# Altium PCB STC89C52.PcbDoc
Units mil, origin at the board's own origin, x right, y up, seen from the top; angles counter-clockwise.
Board outline 1370 x 1620 mil, 2 copper layers (Top Layer, Bottom Layer); 20 components, 53 nets, 124 pads, 8 vias.
Unrouted connection lines stored in the file: 5.
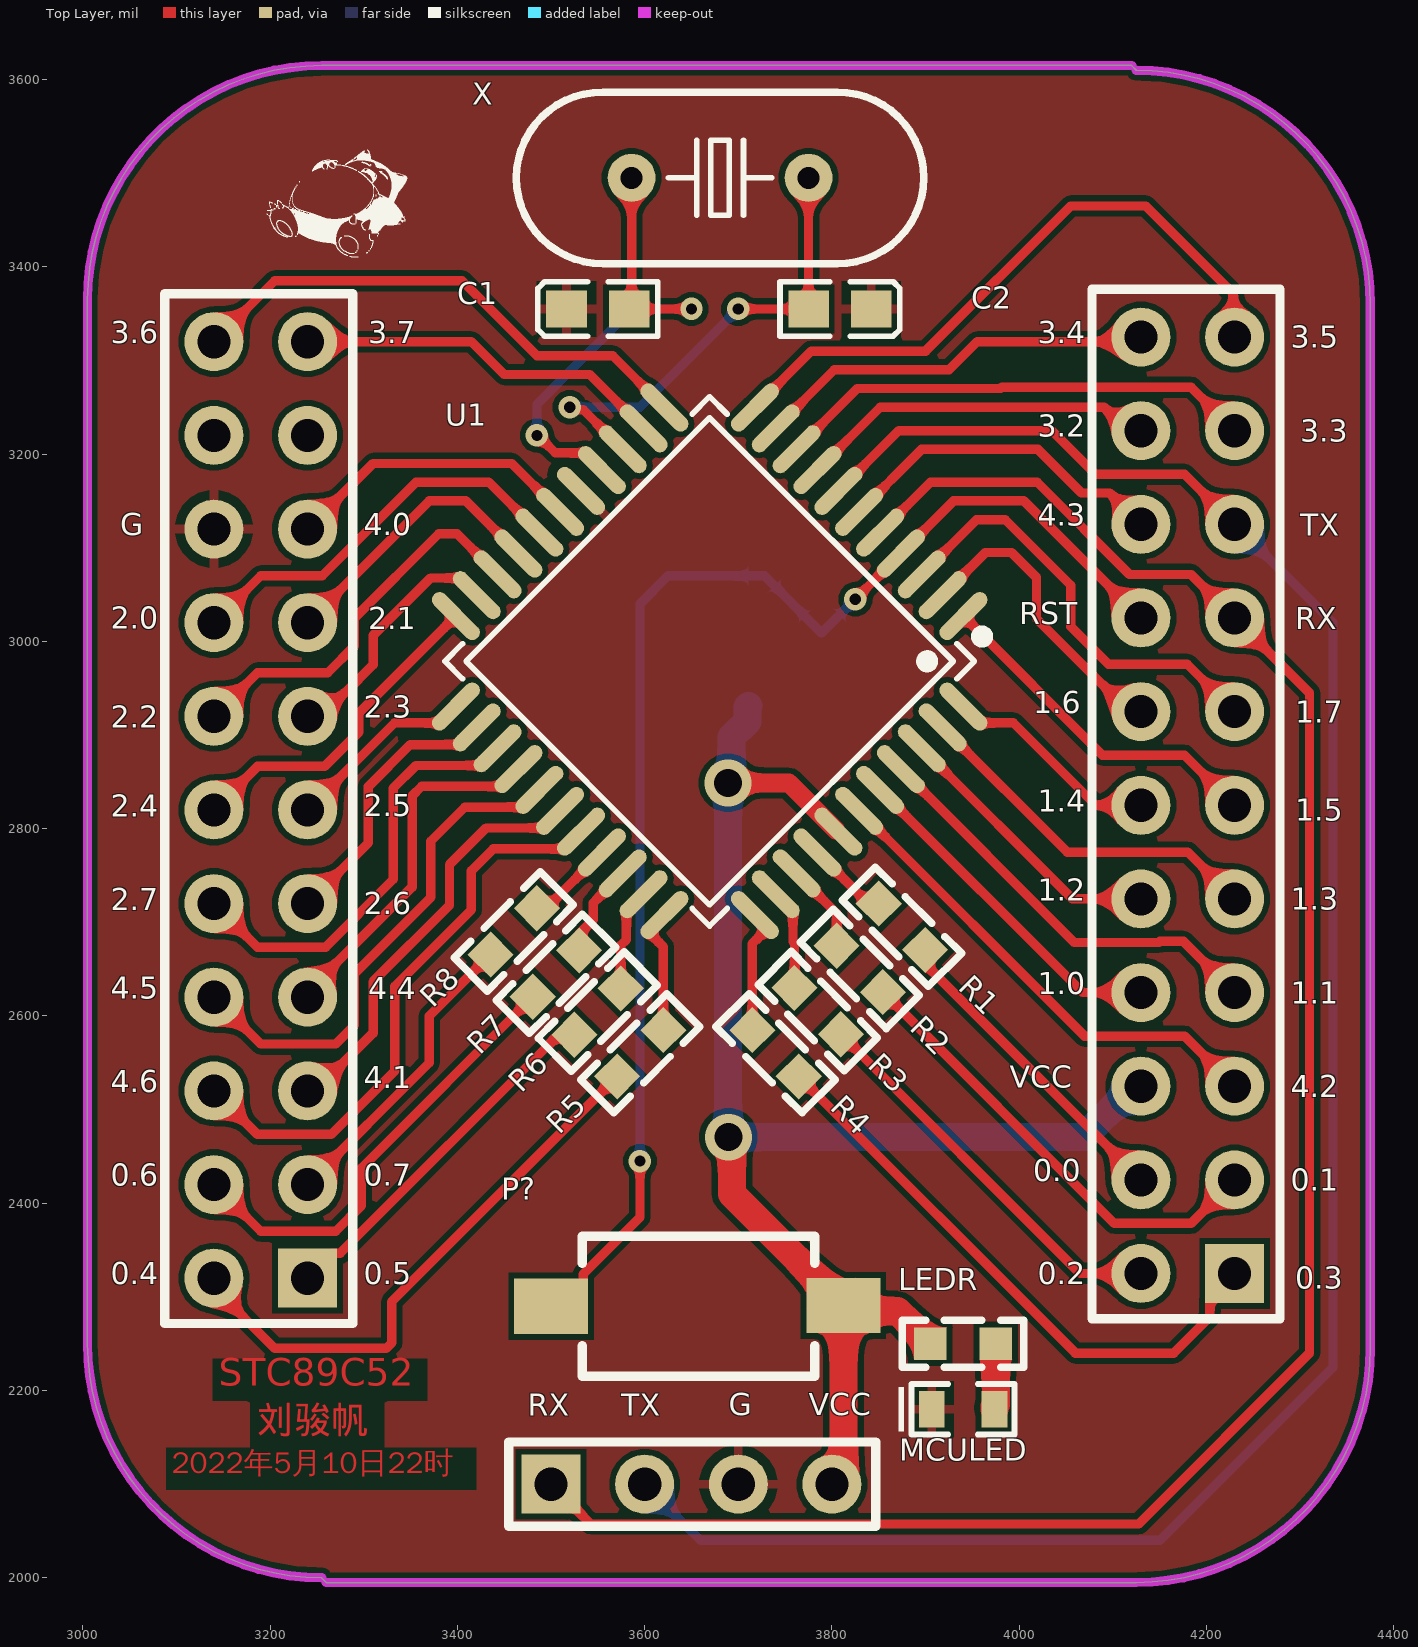
[diagram p0: Top Layer view]
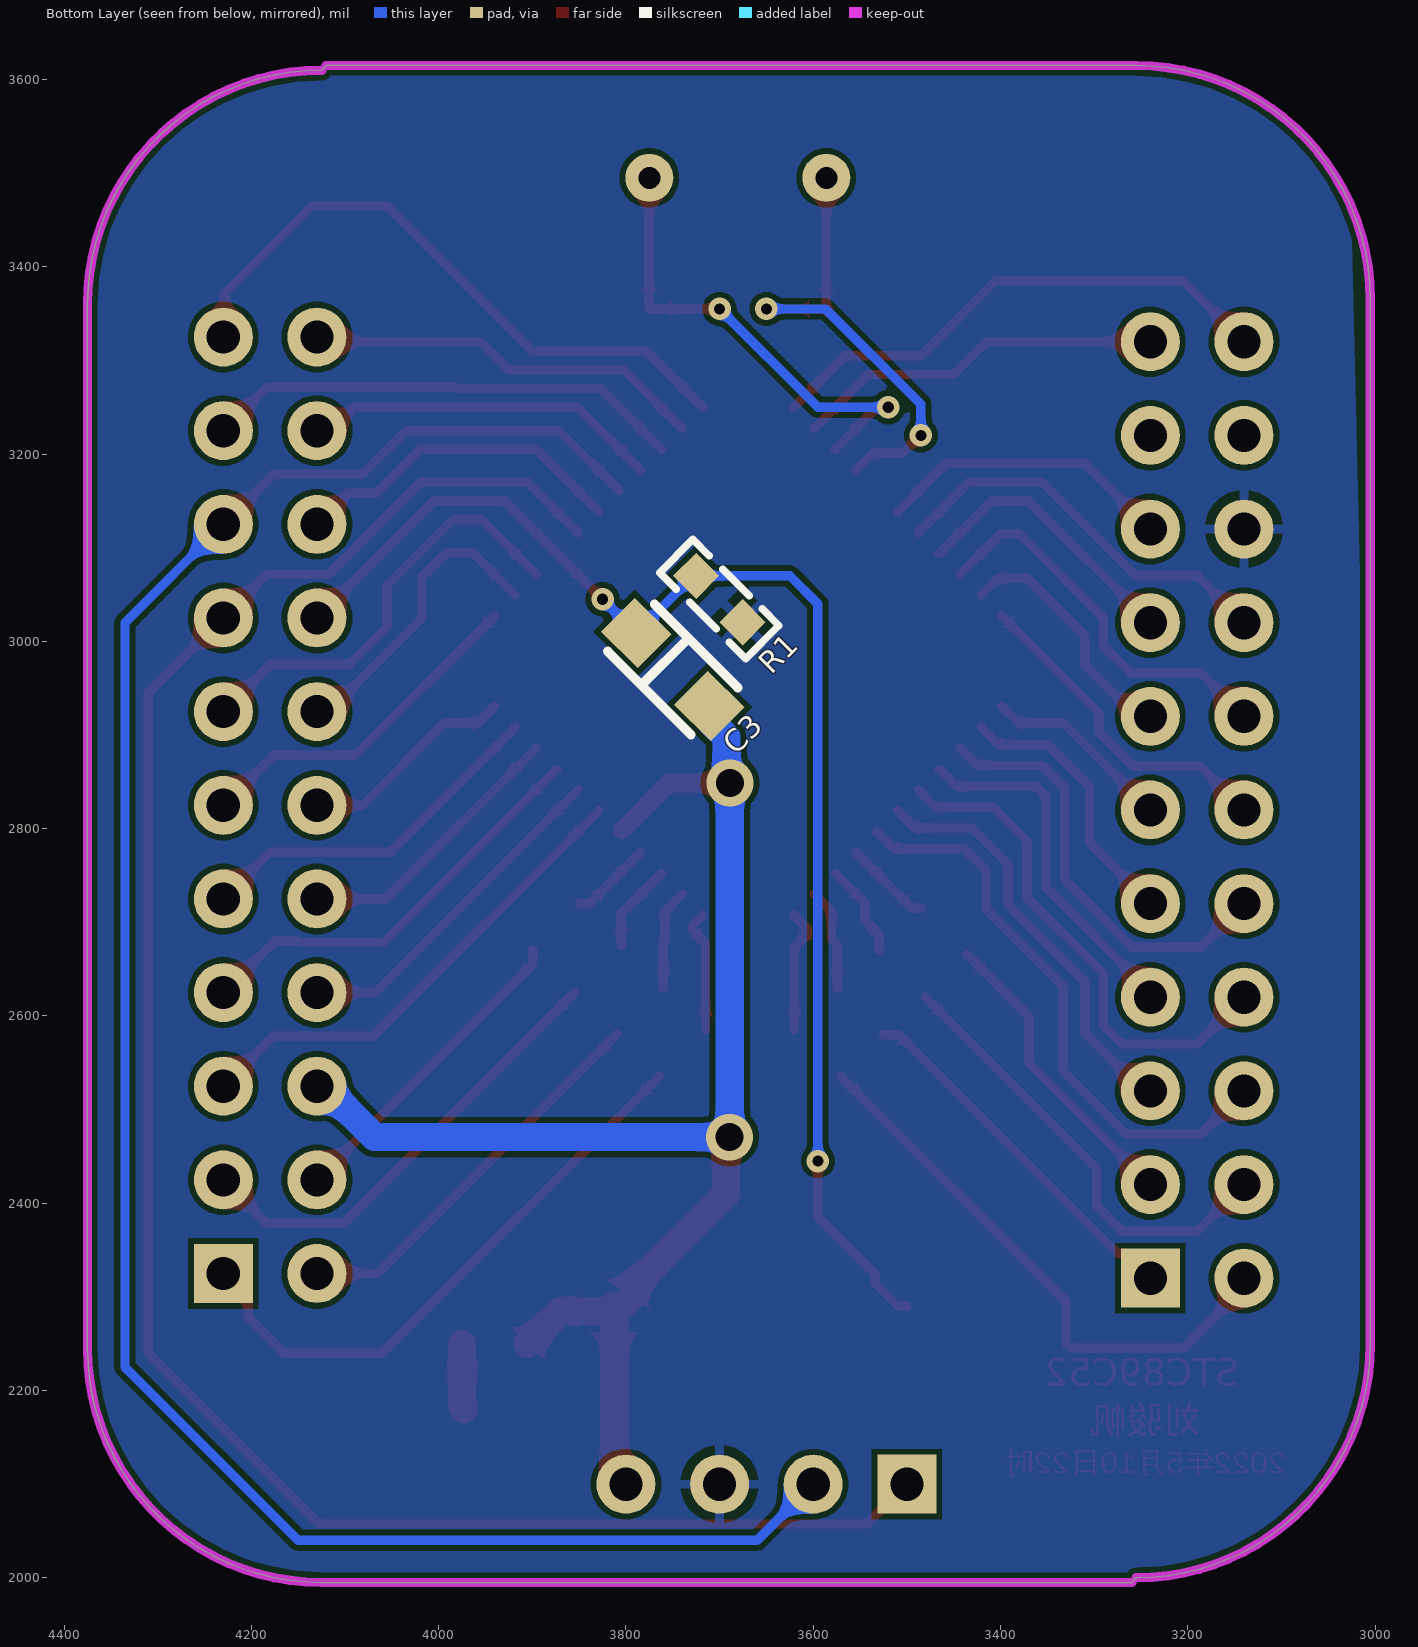
[diagram p1: Bottom Layer view, seen from below]
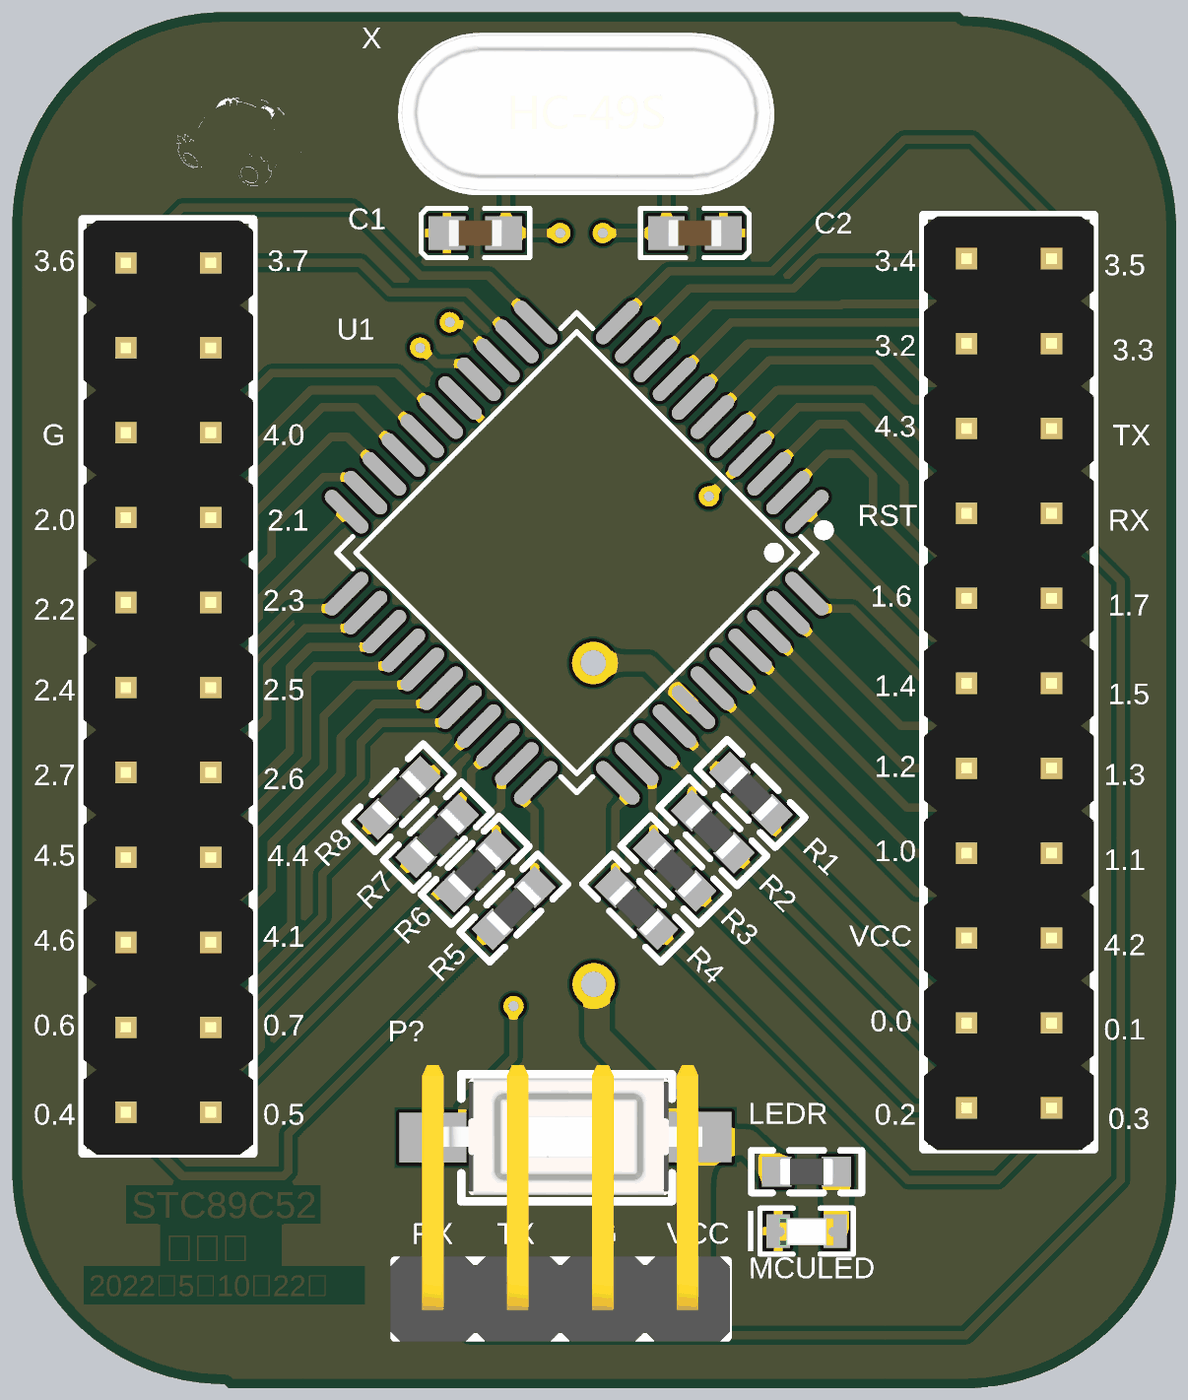
[diagram p2: 3D render of the assembled board from above, using the file's embedded part models]

## Layer stack, top to bottom
Top Solder: solder mask 0.4, Solder Resist, Dk 3.5
Top Layer: signal copper 1.4
Dielectric 1: dielectric 12.6, FR-4, Dk 4.8
Bottom Layer: signal copper 1.4
Bottom Solder: solder mask 0.4, Solder Resist, Dk 3.5

## Board outline
3005,2250 3005,3365 cw(c3255,3365) 3255,3615 4120,3615 4125,3610 cw(c4125,3360) 4375,3360 4375,2245 cw(c4125,2245) 4125,1995 3260,1995 3255,2000 cw(c3255,2250)

## Design rules (kind name [scope] priority, off if disabled: settings)
Clearance [All] p1: gap=6 ignorepadtopadclearanceinfootprint=FALSE
PolygonConnect [All] p1: connectstyle=Relief reliefconductorwidth=10 reliefentries=4 polygonreliefangle="90 Angle" airgapwidth=10
RoutingVias [All] p1: holewidth=28 width=50 viastyle="Through Hole" minholewidth=28 minwidth=50 maxholewidth=28 maxwidth=50
SolderMaskExpansion [All] p1: expansion=4 istentingtop=FALSE
Width [All] p1: maxlimit=50 minlimit=10 preferedwidth=10
30 further rules are at their usual default settings.

## Components (designator, comment, footprint, x,y, rotation, side; value= is the part's Value field where it differs from the comment)
C1 "22pf" Cap-0603 3550,3355 r0 top
C2 "22pf" Cap-0603 3808.46,3355 r180 top
C3 "10uf" CAP_TAN_3216_A 3750,2970 r45 bottom
K? "KEY" SW-SMD-3X6X2.5 3810,2290 r180 top
LEDR "RES" R-0603 3905,2250 r0 top (schematic designator R?)
MCULED "LED_SMD_WHITE" LED_0603_W 3940,2180 r180 top (schematic designator D?)
P1 "Header_2X11" "Header 2.54_2X11" 3190,2820 r90 top
P2 "Header_2X11" "Header 2.54_2X11" 4180,2825 r90 top
P? "Header_4" "Header H 2.54X4" 3650,2100 r0 top
R1 "10K" R-0603 3675.5,3020.5 r45 bottom
R1 "4.7K" R-0603 3899.5,2670.5 r135 top
R2 "4.7K" R-0603 3854.5,2625.5 r135 top
R3 "4.7K" R-0603 3809.5,2580.5 r135 top
R4 "4.7K" R-0603 3764.5,2535.5 r135 top
R5 "4.7K" R-0603 3570.5,2535.5 r45 top
R6 "4.7K" R-0603 3525,2580 r45 top
R7 "4.7K" R-0603 3480.5,2620.5 r45 top
R8 "4.7K" R-0603 3435.5,2665.5 r45 top
U1 "STC89C52RC-40I_C8707" STC89C52RC-40I-LQFP44 3669.43,2978.74 r135 top
X "12MHz" "OSC HC-49S" 3680.51,3495 r0 top

## Footprints (in the part's own frame and the unit in brackets; to place one, negate y for a bottom-side part, rotate by r counter-clockwise, add the part's x,y. Pads: shape width x height; smd on the part's side, far side on the other; paste and mask are expansions set on the pad)
Cap-0603 [mm]
  rect 1.1x1 smd: 1(-0.85,0) 2(0.85,0)
  silkscreen extent -1.63,-0.74 1.63,0.74, body extent -0.8,-0.4 0.8,0.4, height 0.6
CAP_TAN_3216_A [mm]
  rect 1.4x1.3 smd: 1(1.4,0) 2(-1.4,0)
  silkscreen extent -1.6,-0.9 1.6,0.9, body extent -1.6,-0.8 1.6,0.8, height 1.6
"Header 2.54_2X11" [mm]
  rect 1.6x1.6 hole 0.9: 1(-12.7,-1.27)
  round 1.6 hole 0.9: 2(-10.16,-1.27) 3(-7.62,-1.27) 4(-5.08,-1.27) 5(-2.54,-1.27) 6(0,-1.27) 7(2.54,-1.27) 8(5.08,-1.27) 9(7.62,-1.27) 10(10.16,-1.27) 11(12.7,-1.27) 12(12.7,1.27) 13(10.16,1.27) 14(7.62,1.27) 15(5.08,1.27) 16(2.54,1.27) 17(0,1.27) 18(-2.54,1.27) 19(-5.08,1.27) 20(-7.62,1.27) 21(-10.16,1.27) 22(-12.7,1.27)
  silkscreen extent -13.93,-2.5 14,2.6, body extent -13.97,-2.5 13.97,2.58, height 8.6
"Header H 2.54X4" [mm]
  rect 1.6x1.6 hole 0.9: 1(-3.81,0)
  round 1.6 hole 0.9: 2(-1.27,0) 3(1.27,0) 4(3.81,0)
  silkscreen extent -4.95,-1.14 5,1.14, body extent -5.08,-1.27 5.08,7, height 4.43
LED_0603_W [mm]
  rect 0.7x1 smd: 1(-0.85,0) 2(0.85,0)
  silkscreen extent -1.4,-0.69 1.75,0.69, body extent -0.8,-0.38 0.8,0.42, height 0.61
"OSC HC-49S" [mm]
  round 1.3 hole 0.6: 1(-2.4,0) 2(2.4,0)
  silkscreen extent -5.52,-2.32 5.52,2.33, body extent -5.53,-2.29 5.53,2.36, height 4.13
R-0603 [mil] "贴片电阻"
  rect 35x35 smd: 1(0,0) 2(70,0)
  silkscreen extent -30,-25 100,25, body extent 4,-16 66,16, height 31
STC89C52RC-40I-LQFP44 [mm]
  oval 0.42x1.67 smd: 1(-4,-5.735) 2(-3.2,-5.735) 3(-2.4,-5.735) 4(-1.6,-5.735) 5(-0.8,-5.735) 6(0,-5.735) 7(0.8,-5.735) 8(1.6,-5.735) 9(2.4,-5.735) 10(3.2,-5.735) 11(4,-5.735) 23(4,5.735) 24(3.2,5.735) 25(2.4,5.735) 26(1.6,5.735) 27(0.8,5.735) 28(0,5.735) 29(-0.8,5.735) 30(-1.6,5.735) 31(-2.4,5.735) 32(-3.2,5.735) 33(-4,5.735)
  oval 1.67x0.42 smd: 12(5.735,-4) 13(5.735,-3.2) 14(5.735,-2.4) 15(5.735,-1.6) 16(5.735,-0.8) 17(5.735,0) 18(5.735,0.8) 19(5.735,1.6) 20(5.735,2.4) 21(5.735,3.2) 22(5.735,4) 34(-5.735,4) 35(-5.735,3.2) 36(-5.735,2.4) 37(-5.735,1.6) 38(-5.735,0.8) 39(-5.735,0) 40(-5.735,-0.8) 41(-5.735,-1.6) 42(-5.735,-2.4) 43(-5.735,-3.2) 44(-5.735,-4)
  silkscreen extent -5.08,-5.85 5.08,5.08
SW-SMD-3X6X2.5 [mm]
  rect 2x1.5 smd: 1(-0.059,-0.02) 3(7.874,0)
  silkscreen extent 0.73,-1.9 7.03,1.9, body extent -0.19,-1.78 7.81,1.72, height 2.59

## Part data
C1 C2: library part CAP, "贴片陶瓷电容"
C3: library part CAP-TAN, "钽电容"
LEDR: "贴片电阻"
MCULED: "发光二极管", Package=0603, SuppliersPartNumber=C2290, ComponentLink1Description=供应商链接, ComponentLink1URL=http://www.szlcsc.com/product/details_2663.html, Supplier=LC
R1 R1 R2 R3 R4 R5 R6 R7 R8: library part RES, "贴片电阻"
U1: BOM_JLCPCB Part Class="Extended Part", BOM_Manufacturer=STC, BOM_Manufacturer Part=STC89C52RC-40I, BOM_Supplier=LCSC, BOM_Supplier Part=C8707, spicePre=U, spiceSymbolName=STC89C52RC-40I_C8707
X: library part XTAL-2P, "2脚无源脚晶振"

## Via types
v1: diameter 24, hole 12, Top Layer to Bottom Layer, 6 vias
v2: diameter 50, hole 30, Top Layer to Bottom Layer, 2 vias

## Nets (pads, with @x,y where several pads share a name; then routed paths per layer and width w, separated by ;. In a path a pad name is that pad's centre, name@x,y a point inside that pad or via, vN(x,y) a via of type N, cw(c..) or ccw(c..) an arc to the next point about the centre after c; other vN are vias at no path point)
GND: C1.1 C2.1 MCULED.2 P1.14 P?.3 R1.1@3675.5,3020.5 U1.16
NetD?_1: LEDR.2 MCULED.1 | length 70.6
  Top Layer w30: MCULED.1 3973.47,2183.47 3975,2185 LEDR.2
P00: P2.21 R1.1@3899.5,2670.5 | length 341
  Top Layer w10: R1.1@3899.5,2670.5 3899.5,2655.5 P2.21
P0.0: R1.2@3850,2720 U1.37 | length 88.1
  Top Layer w10: U1.37 3839.08,2720 R1.2@3850,2720
P0.1: R2.2 U1.36 | length 95
  Top Layer w10: U1.36 3805,2709.54 R2.2
P0.2: R3.2 U1.35 | length 108.3
  Top Layer w10: U1.35 3758.4,2711.6 3758.4,2679.56 3760,2677.95 R3.2
P0.3: R4.2 U1.34 | length 133.6
  Top Layer w10: R4.2 3715,2677.27 3729.46,2691.73 3729.46,2696 U1.34
P0.4: R5.2 U1.33 | length 135.1
  Top Layer w10: R5.2 3620,2673.7 3605.68,2688.01 3605.68,2692.28 U1.33
P0.5: R6.2 U1.32 | length 110.6
  Top Layer w10: R6.2 3574.5,2675.52 3580.46,2681.49 3580.46,2711.6 U1.32
P0.6: R7.2 U1.31 | length 101.6
  Top Layer w10: R7.2 3530,2687.68 3545,2702.68 3545,2720.68 U1.31
P0.7: R8.2 U1.30 | length 94
  Top Layer w10: R8.2 3494.77,2715 U1.30
P01: P2.2 R2.1 | length 497.1
  Top Layer w10: R2.1 4101.5,2378.5 4183.5,2378.5 P2.2
P1.0: P2.19 U1.40 | length 368.3
  Top Layer w10: U1.40 4067.71,2625 P2.19
P1.1: P2.4 U1.41 | length 456.1
  Top Layer w10: U1.41 4058.75,2678.5 4149.26,2678.5 4150.38,2679.62 4175.38,2679.62 P2.4
P1.2: P2.18 U1.42 | length 300.7
  Top Layer w10: U1.42 4056.79,2725 P2.18
P1.3: P2.5 U1.43 | length 387.7
  Top Layer w10: U1.43 4051.34,2775 4180,2775 P2.5
P1.4: P2.17 U1.44 | length 233.2
  Top Layer w10: U1.44 3957.84,2913.04 3993.61,2913.04 4081.65,2825 P2.17
P1.5: P2.6 U1.1 | length 373.2
  Top Layer w10: U1.1 4088.98,2878.5 4176.5,2878.5 P2.6
P1.6: P2.16 U1.2 | length 327
  Top Layer w10: U1.2 3963.86,3095 3991.72,3095 4018.36,3068.36 4018.36,3024.22 4117.57,2925 P2.16
P1.7: P2.7 U1.3 | length 469.1
  Top Layer w10: U1.3 3954.32,3130 3985,3130 4055,3060 4055,3015.86 4095.36,2975.5 4179.5,2975.5 P2.7
P02: P2.22 R3.1 | length 426.3
  Top Layer w10: R3.1 4065,2325 P2.22
P2.0: P1.15 U1.18 | length 432
  Top Layer w10: P1.15 3190,3070 3255.76,3070 3355.76,3170 3433.63,3170 U1.18
P2.1: P1.8 U1.19 | length 302.3
  Top Layer w10: P1.8 3370,3150 3409.08,3150 U1.19
P2.2: P1.16 U1.20 | length 419.3
  Top Layer w10: P1.16 3186.5,2966.5 3261.5,2966.5 3290,2995 3290,3025 3380,3115 3399.54,3115 U1.20
P2.3: P1.7 U1.21 | length 267.8
  Top Layer w10: P1.7 3254.34,2920 3279.34,2945 3280,2945 3310,2975 3310,3006.33 3371.38,3067.71 3402.29,3067.71 U1.21
P2.4: P1.17 U1.22 | length 356.1
  Top Layer w10: P1.17 3186.5,2866.5 3258.21,2866.5 3295,2903.28 3295,2923.62 U1.22
P2.5: P1.6 U1.23 | length 204.2
  Top Layer w10: P1.6 3333.04,2913.04 3381.02,2913.04 U1.23
P2.6: P1.5 U1.24 | length 293.8
  Top Layer w10: P1.5 3305,2785 3305,2845 3349.77,2889.77 3402.29,2889.77 U1.24
P2.7: P1.18 U1.25 | length 467.3
  Top Layer w10: P1.18 3186.5,2673.5 3259.26,2673.5 3331.64,2745.89 3331.64,2843.36 3355.79,2867.5 3424.56,2867.5 U1.25
P03: P2.1 R4.1 | length 634.8
  Top Layer w10: R4.1 4060,2240 4165,2240 4203.5,2278.5 4203.5,2298.5 P2.1
P3.2: P2.13 U1.8 | length 383.6
  Top Layer w10: U1.8 3851.6,3250 4090.66,3250 4115.66,3225 P2.13
P3.3: P2.10 U1.9 | length 514.4
  Top Layer w10: U1.9 3827.06,3270 3980,3270 3981.5,3271.5 4183.5,3271.5 P2.10
P3.4: P2.12 U1.10 | length 430.4
  Top Layer w10: U1.10 3802.52,3290 3925,3290 3955,3320 4125,3320 P2.12
P3.5: P2.11 U1.11 | length 685.8
  Top Layer w10: U1.11 3777.98,3310 3900,3310 4055,3465 4135,3465 4228.5,3371.5 4228.5,3326.5 P2.11
P3.6: P1.12 U1.12 | length 564.1
  Top Layer w10: P1.12 3205,3385 3405,3385 3485,3305 3565.88,3305 U1.12
P3.7: P1.11 U1.13 | length 397.2
  Top Layer w10: P1.11 3415,3320 3450,3285 3541.34,3285 U1.13
P04: P1.22 R5.1 | length 613.6
  Top Layer w10: P1.22 3140,2310 3205,2245 3324.14,2245 3330,2250.86 3330,2295 R5.1
P4.0: P1.9 U1.17 | length 320.1
  Top Layer w10: P1.9 3310,3190 3458.17,3190 U1.17
P4.1: P1.3 U1.28 | length 451.2
  Top Layer w10: P1.3 3248.28,2520 3310,2581.72 3310,2636.72 3391.64,2718.36 3391.64,2761.64 3430.69,2800.69 3491.38,2800.69 U1.28
P4.2: P2.3 U1.39 | length 522.7
  Top Layer w10: U1.39 4069.66,2578.5 4176.5,2578.5 P2.3
P4.3: P2.14 U1.6 | length 361.6
  Top Layer w10: U1.6 3895.69,3205 4020,3205 4066.5,3158.5 4096.5,3158.5 P2.14
P4.4: P1.4 U1.26 | length 386.7
  Top Layer w10: P1.4 3240,2625.96 3351.64,2737.6 3351.64,2794.93 3351.64,2835 3361.87,2845.23 3446.84,2845.23 U1.26
P4.5: P1.19 U1.27 | length 548
  Top Layer w10: P1.19 3190,2570 3270,2570 3290,2590 3290,2645 3371.64,2726.64 3371.64,2786.64 3407.96,2822.96 3469.11,2822.96 U1.27
P4.6: P1.20 U1.29 | length 622.4
  Top Layer w10: P1.20 3186.5,2473.5 3265.22,2473.5 3333.28,2541.57 3333.28,2631.72 3415,2713.43 3415,2755 3438.42,2778.42 3513.65,2778.42 U1.29
P05: P1.1 R6.1 | length 392.7
  Top Layer w10: P1.1 3266.5,2346.5 3274.78,2346.5 3508.28,2580 R6.1
P06: P1.21 R7.1 | length 488.4
  Top Layer w10: P1.21 3190,2370 3270,2370 3297.5,2397.5 3297.5,2437.5 R7.1
P07: P1.2 R8.1 | length 326.5
  Top Layer w10: P1.2 3370,2550 3370,2600 R8.1
RST: C3.1 K?.3 P2.15 R1.2@3725,3070 U1.4 | length 1478.1
  Top Layer w10: K?.3 3509.84,2290 3534.37,2314.53 3534.37,2324.37 3595,2385 v1(3595,2445) ; v1(3825,3045) 3825,3045.11 3873.63,3093.74 U1.4 3929.77,3150 4005,3150 P2.15
  Bottom Layer w10: v1(3595,2445) 3595,3040 3625,3070 3725,3070 3727.95,3070 C3.1 v1(3825,3045)
RXD: P2.8 P?.1 U1.5 | length 2182.4
  Top Layer w10: P?.1 3542.5,2057.5 4127.5,2057.5 4310,2240 4310,2945 P2.8 4183.5,3071.5 4117.75,3071.5 4019.24,3170 3905.23,3170 U1.5
TXD: P2.9 P?.2 U1.7 | length 2271.2
  Top Layer w10: U1.7 3871.15,3225 4035,3225 4081.5,3178.5 4176.5,3178.5 P2.9
  Bottom Layer w10: P?.2 3660,2040 4150,2040 4335,2225 4335,3020 P2.9
VCC: C3.2 K?.1 LEDR.1 P2.20 P?.4 U1.38 | length 1612.8
  Top Layer w10: U1.38 U1.38@3806.81,2798.58
  Top Layer w20: v2(3688.86,2848.86) 3753.86,2848.86 U1.38@3804.14,2798.58
  Top Layer w30: v2(3689.43,2470.57) 3693.26,2466.74 3693.26,2409.84 3787.94,2315.16 3787.94,2305.31 3802.47,2290.79 K?.1 ; P?.4 3800,2108.93 3812.31,2121.24 K?.1 ; LEDR.1 3870.14,2284.86 3818.24,2284.86 K?.1
  Bottom Layer w30: C3.2 3709.63,2929.63 3709.63,2914.66 3692.69,2897.71 3692.69,2852.69 v2(3688.86,2848.86) 3689.14,2848.57 3689.14,2470.86 v2(3689.43,2470.57) 4068.59,2470.57 4123.02,2525 P2.20
X1: C1.2 U1.15 X.1 | length 537.6
  Top Layer w10: v1(3485,3220) 3485.85,3220 3504.52,3201.33 3535.92,3201.33 U1.15 ; C1.2@3583.46,3350 3586.02,3352.56 C1.2@3586.02,3355 ; C1.2 C1.2@3586.02,3355 ; X.1 C1.2@3586.02,3355 ; v1(3650,3355) C1.2@3586.02,3355
  Bottom Layer w10: v1(3485,3220) 3485,3253.18 3586.82,3355 v1(3650,3355)
X2: C2.2 U1.14 X.2 | length 513.6
  Top Layer w10: v1(3520,3250) 3522.68,3247.32 3534.47,3247.32 U1.14 ; v1(3700,3355) C2.2 X.2
  Bottom Layer w10: v1(3520,3250) 3595,3250 v1(3700,3355)
pads on no net: P1.10 P1.13

## Polygon pours and split planes (outlines as drawn)
GND on Top Layer "GND_L01_P000" (solid, remove dead copper, pour order 0): 2980,3620 2985,3615 4450,3615 4450,2005 4410,1965 2985,1965
GND on Bottom Layer "GND_L02_P001" (solid, remove dead copper, pour order 1): 3030,3625 4395,3625 4375,3605 4375,2005 3005,2005 2990,2020

## Keep-outs
Keep-Out Layer:
  lines w10: 3255,2000 cw(c3255,2250) 3005,2250 3005,3365 cw(c3255,3365) 3255,3615 4120,3615 ; 3260,1995 4125,1995 ccw(c4125,2245) 4375,2245 4375,3360 ccw(c4125,3360) 4125,3610

## Other copper
Top Layer:
  text "STC89C52" at 3145,2195.55 h50
  text "刘骏帆" at 3185,2144.53 h50
  text "2022年5月10日22时" at 3094.96,2103.63 h40

## Silkscreen, mask and mechanical layers (free items; w line width, h text height)
Top Overlay:
  drawing of 69 lines, arcs and shapes, not listed
  text "3.6" at 3030,3310.44 h40
  text "3.7" at 3305,3310.44 h40
  text "3.4" at 4020,3310.44 h40
  text "3.5" at 4290,3305.44 h40
  text "3.2" at 4020,3210.44 h40
  text "3.3" at 4300,3205.44 h40
  text "4.3" at 4020,3115.44 h40
  text "G" at 3040,3105.44 h40
  text "4.0" at 3300,3105.44 h40
  text "TX" at 4300,3105 h40
  text "RST" at 4000,3010.44 h40
  text "2.0" at 3029.96,3005.44 h40
  text "2.1" at 3304.96,3005 h40
  text "RX" at 4295,3005 h40
  text "1.6" at 4015,2915.44 h40
  text "2.3" at 3299.96,2910.44 h40
  text "1.7" at 4295,2905 h40
  text "2.2" at 3029.96,2900 h40
  text "1.4" at 4020,2810 h40
  text "2.4" at 3029.96,2805 h40
  text "2.5" at 3299.96,2805.44 h40
  text "1.5" at 4295,2800.44 h40
  text "1.2" at 4020,2715 h40
  text "2.7" at 3029.96,2705 h40
  text "1.3" at 4290,2705.44 h40
  text "2.6" at 3299.96,2700.44 h40
  text "1.0" at 4020,2615.44 h40
  text "4.5" at 3030,2610.44 h40
  text "4.4" at 3305,2610 h40
  text "1.1" at 4290,2605 h40
  text "4.1" at 3300,2515 h40
  text "VCC" at 3990.04,2515.44 h40
  text "4.6" at 3030,2510.44 h40
  text "4.2" at 4290,2505 h40
  text "0.0" at 4015,2415.44 h40
  text "0.6" at 3030,2410.44 h40
  text "0.7" at 3300,2410.44 h40
  text "0.1" at 4290,2405.44 h40
  text "0.4" at 3030,2305.44 h40
  text "0.5" at 3300,2305.44 h40
  text "0.2" at 4020,2305.44 h40
  text "0.3" at 4295,2300.44 h40
  text "RX" at 3475,2165 h40
  text "TX" at 3575,2165 h40
  text "G" at 3690,2165.44 h40
  text "VCC" at 3775.04,2165.44 h40
Bottom Overlay:
  region: 4679.17,2565.48 4681.26,2565.48 4681.26,2564.78 4678.47,2564.78 4678.47,2564.08 4678.47,2563.39 4678.47,2562.69 4678.47,2561.99 4678.47,2561.29 4678.47,2560.59 4678.47,2559.9 4677.77,2559.9 4677.77,2560.59 4677.77,2561.29 4677.77,2561.99 4677.77,2562.69 4677.77,2563.39 4677.77,2564.08 4672.89,2564.08 4672.89,2564.78 4677.77,2564.78 4677.77,2565.48 4678.47,2565.48 4678.47,2566.18 4679.17,2566.18
  region: 4675.68,2557.1 4677.07,2557.1 4677.07,2556.41 4677.07,2555.71 4677.07,2555.01 4677.07,2554.31 4677.07,2553.61 4677.07,2552.92 4677.77,2552.92 4677.77,2552.22 4677.77,2551.52 4677.77,2550.82 4677.07,2550.82 4677.07,2551.52 4677.07,2552.22 4677.07,2552.92 4676.38,2552.92 4676.38,2553.61 4676.38,2554.31 4676.38,2555.01 4676.38,2555.71 4676.38,2556.41 4675.68,2556.41 4675.68,2557.1 4674.98,2557.1 4674.98,2557.8 4675.68,2557.8
  region: 4677.07,2575.95 4676.38,2575.95 4676.38,2575.25 4676.38,2574.55 4676.38,2573.85 4676.38,2573.16 4675.68,2573.16 4675.68,2573.85 4675.68,2574.55 4675.68,2575.25 4675.68,2575.95 4675.68,2576.65 4677.07,2576.65
  region: 4677.77,2559.2 4677.77,2558.5 4677.77,2557.8 4677.77,2557.1 4677.07,2557.1 4677.07,2557.8 4677.07,2558.5 4677.07,2559.2 4677.07,2559.9 4677.77,2559.9
  region: 4679.17,2547.33 4679.17,2546.64 4679.86,2546.64 4679.86,2545.94 4679.86,2545.24 4679.17,2545.24 4679.17,2545.94 4679.17,2546.64 4678.47,2546.64 4678.47,2547.33 4678.47,2548.03 4679.17,2548.03
  region: 4679.17,2575.25 4680.56,2575.25 4680.56,2574.55 4679.17,2574.55 4679.17,2575.25 4677.77,2575.25 4677.77,2575.95 4679.17,2575.95
  region: 4672.89,2559.2 4673.58,2559.2 4673.58,2558.5 4672.89,2558.5 4672.89,2559.2 4672.19,2559.2 4672.19,2559.9 4672.89,2559.9
  region: 4677.77,2568.97 4677.77,2568.27 4677.07,2568.27 4677.07,2568.97 4677.07,2569.67 4677.77,2569.67
  region: 4677.07,2571.06 4677.07,2570.36 4676.38,2570.36 4676.38,2571.06 4676.38,2571.76 4677.07,2571.76
  region: 4678.47,2549.43 4678.47,2548.73 4677.77,2548.73 4677.77,2549.43 4677.77,2550.12 4678.47,2550.12